# Altium PCB STLINKV2.PcbDoc (part 1 of 2)
Units mm, origin at the board's own origin, x right, y up, seen from the top; angles counter-clockwise.
Board outline 43.47 x 15.24 mm, 2 copper layers (Top Layer, Bottom Layer), stack 1.062 mm thick; 48 components, 36 nets, 171 pads, 85 vias.
Unrouted connection lines stored in the file: 38.
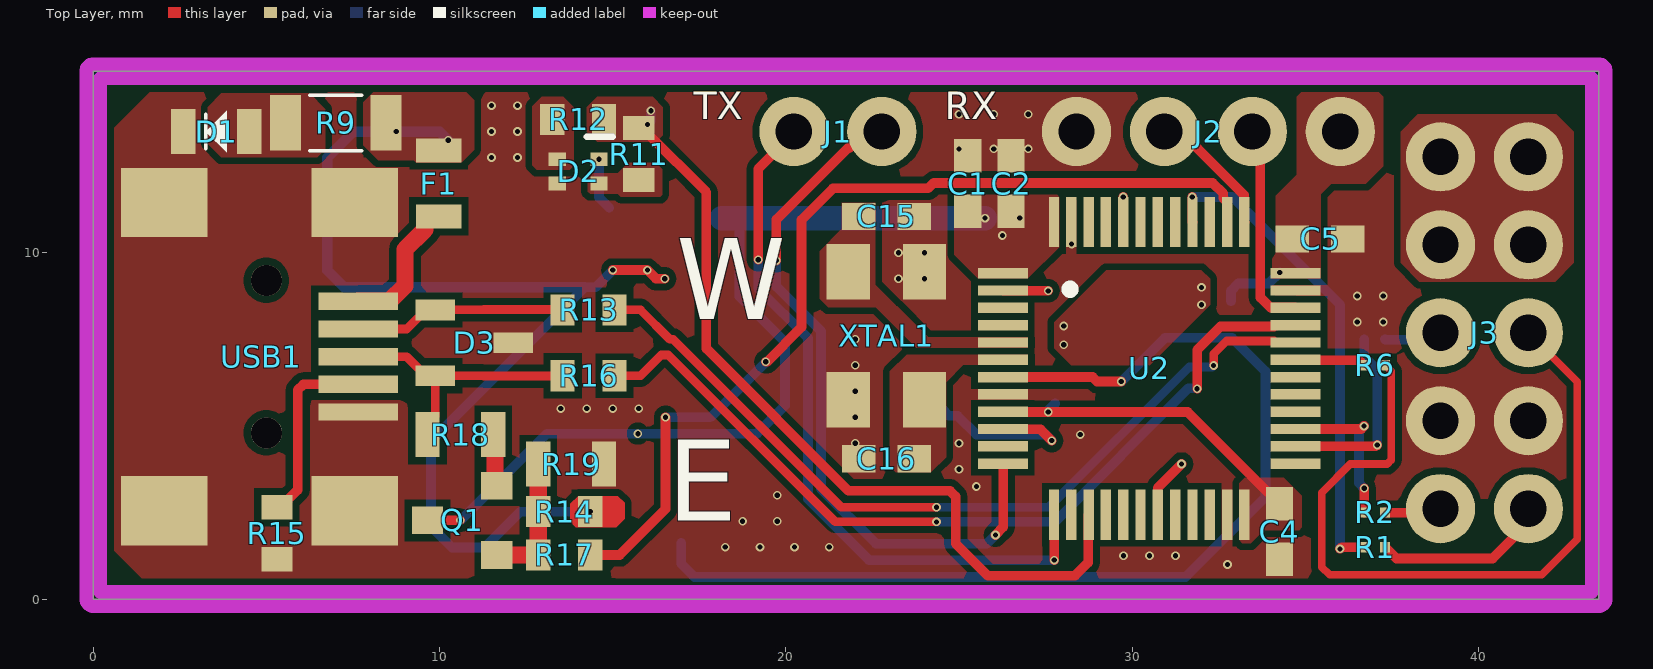
[diagram p0: Top Layer view]
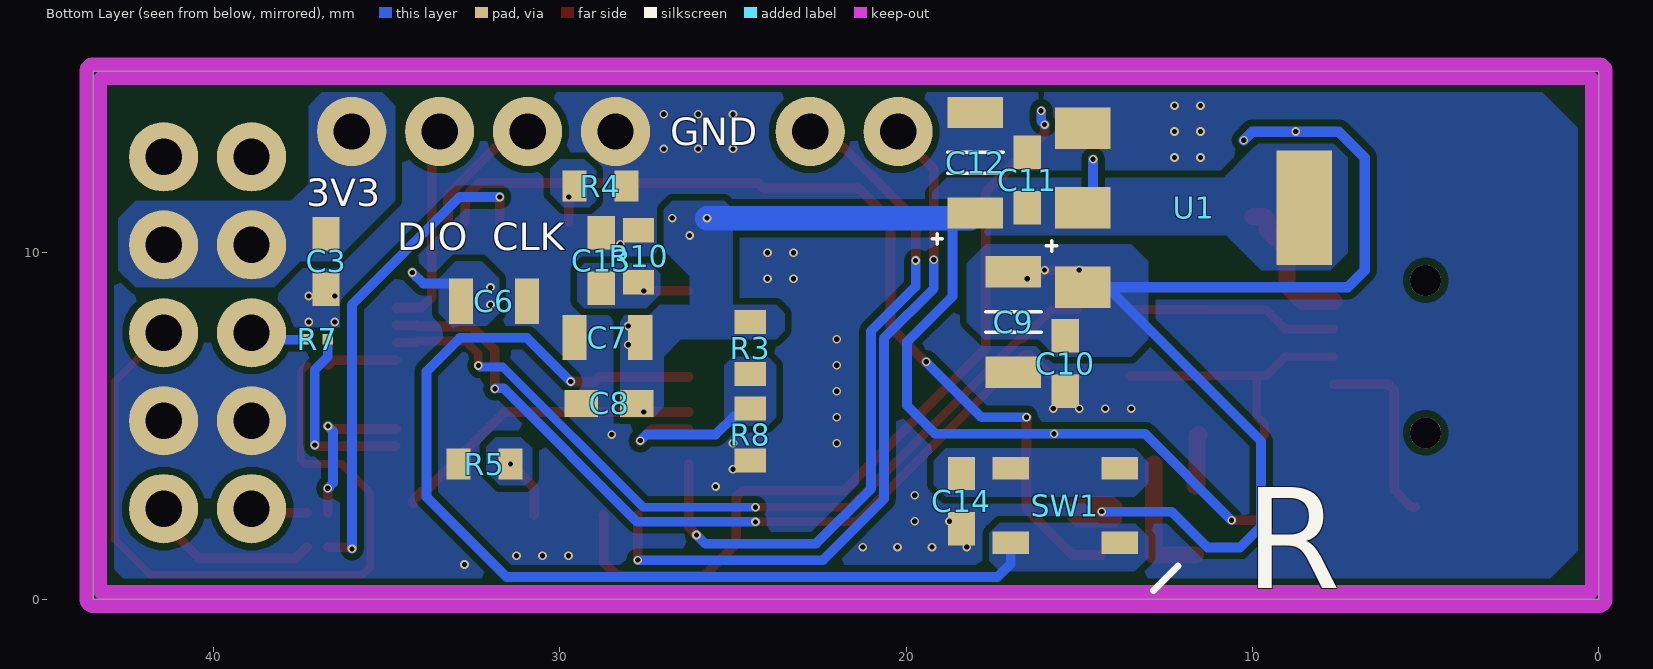
[diagram p1: Bottom Layer view, seen from below]
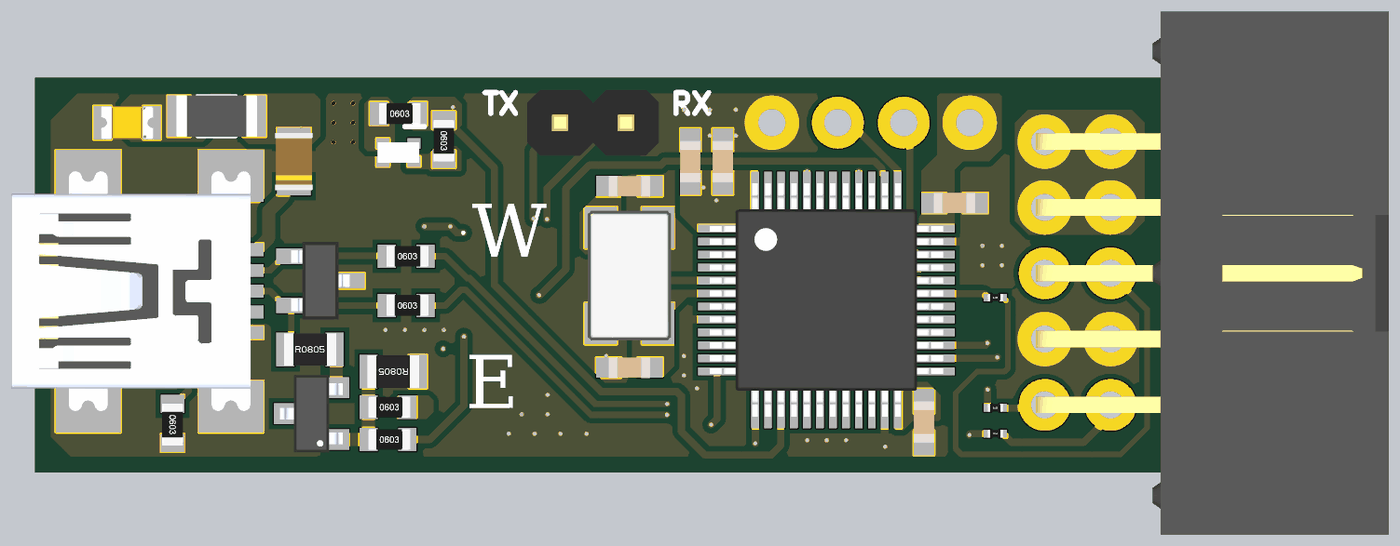
[diagram p2: 3D render of the assembled board from above, using the file's embedded part models]
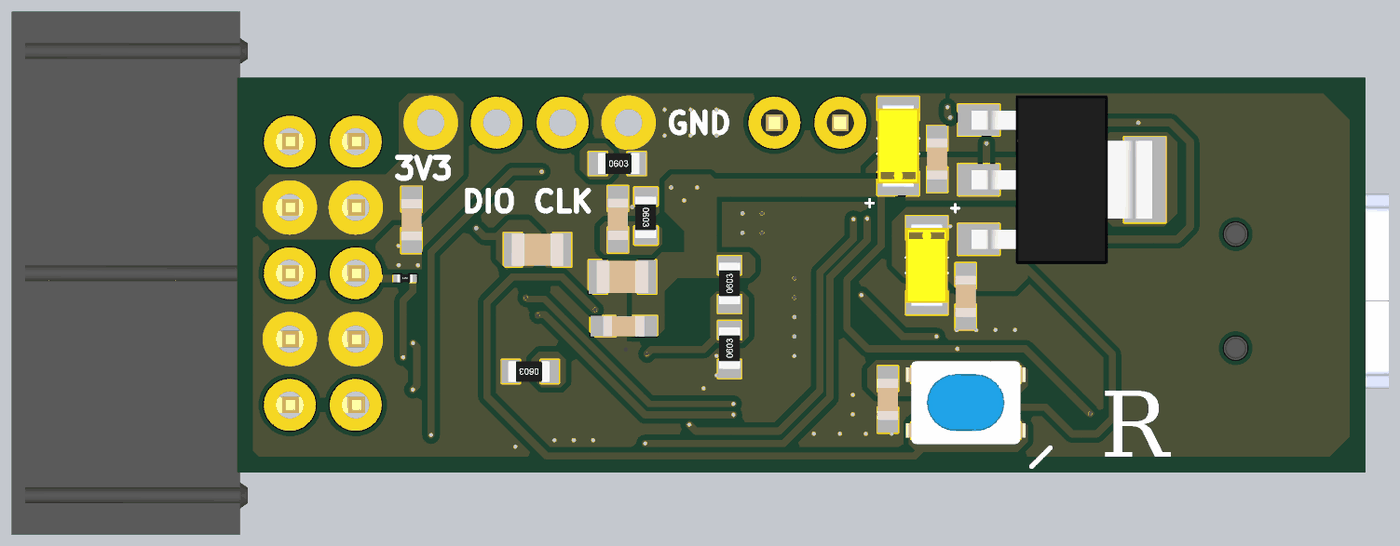
[diagram p3: 3D render of the assembled board from below, using the file's embedded part models]

## Layer stack, top to bottom
Top Solder: solder mask 0.0102, Solder Resist, Dk 3.5
Top Layer: signal copper 0.0356
Dielectric 1: dielectric 0.9906, FR-4, Dk 4.8
Bottom Layer: signal copper 0.0356
Bottom Solder: solder mask 0.0102, Solder Resist, Dk 3.5

## Board outline
0,0 0,15.24 43.47,15.24 43.47,0

## Design rules (kind name [scope] priority, off if disabled: settings)
BoardOutlineClearance [All] p1: gap=0.2 ignorepadtopadclearanceinfootprint=FALSE except(0: Arc-SplitContinuation Track-SplitContinuation SMDPad-SplitContinuation THPad-SplitContinuation Via-SplitContinuation Fill-SplitContinuation Poly-SplitContinuation Region-SplitContinuation Text-SplitContinuation)
Clearance [All] p1: gap=0.2 ignorepadtopadclearanceinfootprint=FALSE except(0: Arc-Hole Track-Hole SMDPad-Hole THPad-Hole Via-Hole Fill-Hole Poly-Hole Region-Hole Text-Hole; 0.1: Arc-Arc Arc-Track Arc-SMDPad Arc-Via Track-Track Track-SMDPad Track-Via SMDPad-Via THPad-Via Via-Via; 0.3: Arc-THPad Track-THPad)
DiffPairsRouting DiffPairsRouting_1 [All] p1: maxlimit=0.1 minlimit=0.1 mostfreqgap=0.1 toplayer_minwidth=0.25 toplayer_maxwidth=0.25 toplayer_prefwidth=0.25 bottomlayer_minwidth=0.25 bottomlayer_maxwidth=0.25 bottomlayer_prefwidth=0.25 impedanceprofiledriven=TRUE impedanceprofileid={4BED7BEF-0427-406D-AE6A-BF7EE6FA518D} impedanceprofilevalue=90.000000 maxuncoupledlength=12.7
DiffPairsRouting [All] p2: maxlimit=0.1 minlimit=0.1 mostfreqgap=0.1 toplayer_minwidth=0.25 toplayer_maxwidth=0.25 toplayer_prefwidth=0.25 bottomlayer_minwidth=0.25 bottomlayer_maxwidth=0.25 bottomlayer_prefwidth=0.25 impedanceprofiledriven=TRUE impedanceprofileid={5705A012-6DC9-405D-9E10-A1258226CF84} impedanceprofilevalue=90.000000 maxuncoupledlength=12.7
HoleSize [All] p1: absolutevalues=TRUE maxlimit=6.3 minlimit=0.15 maxpercent=80.000 minpercent=20.000
HoleToHoleClearance [All] p1: gap=0.1 allowstackedmicrovias=TRUE
MinimumSolderMaskSliver [All] p1: minsoldermaskwidth=0.1
PlaneClearance [All] p1: clearance=0.3
PlaneConnect [All] p1: planeconnectstyle=Direct reliefexpansion=0.508 reliefentries=4 reliefconductorwidth=0.254 reliefairgap=0.254
PolygonConnect [All] p1: connectstyle=Direct reliefconductorwidth=0.254 reliefentries=4 polygonreliefangle="90 Angle" airgapwidth=0.254
RoutingVias [All] p1: holewidth=0.15 width=0.25 viastyle="Through Hole" minholewidth=0.15 minwidth=0.25 maxholewidth=6 maxwidth=6.15
SilkToSilkClearance [All] p1: silktosilkclearance=0.15
SilkToSolderMaskClearance [IsPad] p1: minsilkscreentomaskgap=0.15 clearancetoexposedcopper=TRUE
SolderMaskExpansion [All] p1: expansion=0.05 istentingtop=FALSE
Width [All] p1: maxlimit=30 minlimit=0.1 preferedwidth=0.7 minimp=50.000000 maximp=50.000000 favimp=50.000000
22 further rules are at their usual default settings.

## Classes and differential pairs
component class PowerManagement: C1 C2 C3 C4 C5 C6 C7 C8 C9 C10 C11 C12 J1 J2 J3 R1 R2 R3 R4 R5 R6 R7 R8 U1
component class MCU: C13 C14 C15 C16 D1 D2 R9 R10 R11 R12 R13 R16 SW1 U2 XTAL1
component class USB: D3 F1 Q1 R14 R15 R17 R18 R19 USB1
differential pair USB: +USB_P -USB_N
differential pair USB_RES: +USB_RES_P -USB_RES_N

## Components (designator, comment, footprint, x,y, rotation, side; value= is the part's Value field where it differs from the comment)
C1 "C0603C104K5RACTU" CAP_0603 25.25,12 r270 top
C2 "C0603C104K5RACTU" CAP_0603 26.5,12 r270 top
C3 "C0603C104K5RACTU" CAP_0603 36.75,9.75 r90 bottom
C4 "C0603C104K5RACTU" CAP_0603 34.25,1.95 r90 top
C5 "C0603C104K5RACTU" CAP_0603 35.425,10.4 r180 top
C6 "CL21A475KAQNNNE" CAP_0805 31.9,8.6 r0 bottom
C7 "CL21B105KBFNNNE" CAP_0805 28.625,7.55 r180 bottom
C8 "0603B103K160CT" CAP_0603 28.575,5.65 r180 bottom
C9 "T491A106K010AT" CAP_1206_TANT 16.9,8 r270 bottom
C10 "C0603C104K5RACTU" CAP_0603 15.4,6.8 r90 bottom
C11 "C0603C104K5RACTU" CAP_0603 16.5,12.1 r270 bottom
C12 "T491A106K010AT" CAP_1206_TANT 18,12.6 r90 bottom
C13 "C0603C104K5RACTU" CAP_0603 28.8,9.775 r270 bottom
C14 "C0603C104K5RACTU" CAP_0603 18.4,2.825 r90 bottom
C15 "CC0603FRNPO9BN120" CAP_0603 22.9,11.05 r180 top
C16 "CC0603FRNPO9BN120" CAP_0603 22.9,4.05 r0 top
D1 "LTST-C170KFKT" LED_ORANGE_0805 3.55,13.5 r0 top
D2 "APHB1608CGKSURKC" LED_INDP_GREENRED_0603 14,12.35 r0 top
D3 "SM712" SOT-23 11,7.4 r0 top
F1 "PRG21BC1R0MM1RA" FUSE_0805 9.975,12 r90 top
J1 "61300211121" "2X1 MALE HEADER 2.54MM" 21.5,13.5 r0 top
J2 "2.54mm" "4X1 PINOUT" 32.2,13.5 r180 top
J3 "SBH11-PBPC-D05-RA-BK" "5X2 MALE HEADER 2.54MM SHROUDED - 4 WALL" 38.9,7.69 r270 top
Q1 "BC817-16" SOT23 10.65,2.275 r90 top
R1 "AC0201FR-0722RL" RES_0201 37,1.5 r0 top
R2 "AC0201FR-0722RL" RES_0201 37,2.5 r0 top
R3 "RC0603JR-074K7L" RES_0603 24.5,7.25 r90 bottom
R4 "RC0603FR-0710KL" RES_0603 28.825,11.925 r180 bottom
R5 "RC0603FR-0710KL" RES_0603 32.175,3.9 r0 bottom
R6 "AC0201FR-0722RL" RES_0201 37,6.75 r0 top
R7 "AC0201FR-0722RL" RES_0201 37,7.5 r0 bottom
R8 "RC0603JR-074K7L" RES_0603 24.5,4.75 r90 bottom
R9 "RC1206FR-07680RL" RES_1206 7,13.75 r180 top
R10 "RC0603FR-0710KL" RES_0603 27.725,9.9 r270 bottom
R11 "ERJ-H3EF3300V" RES_0603 15.75,12.85 r270 top
R12 "ERJ-H3EF3300V" RES_0603 14,13.85 r0 top
R13 "RC0603JR-0715RL" RES_0603 14.3,8.35 r0 top
R14 "RC0603FR-0710KL" RES_0603 13.6,2.525 r0 top
R15 "RC0603FR-0710KL" RES_0603 5.3,1.9 r270 top
R16 "RC0603JR-0715RL" RES_0603 14.3,6.45 r0 top
R17 "RC0603JR-07100RL" RES_0603 13.6,1.275 r0 top
R18 "RC0805FR-071K5L" RES_0805 10.6,4.75 r0 top
R19 "RC0805FR-0736KL" RES_0805 13.8,3.9 r180 top
SW1 "PTS810 SJG 250 SMTR LFS" BUTTON_SMD_BLUE 15.4,2.7 r0 bottom
U1 "LM1117MPX-33NOPB" SOT223 11.7,11.3 r270 bottom
U2 "STM32F103C8T6" LQFP48-STM 30.49,6.66 r0 top
USB1 "690-005-299-043" MINI_USB_B 5,7 r270 top
XTAL1 "ECS-80-10-30B-CWN-TR" "4-SMD, No Lead" 22.9,7.6 r270 top

## Footprints (in the part's own frame and the unit in brackets; to place one, negate y for a bottom-side part, rotate by r counter-clockwise, add the part's x,y. Pads: shape width x height; smd on the part's side, far side on the other; paste and mask are expansions set on the pad)
"2X1 MALE HEADER 2.54MM" [mm]
  round 2 hole 1.05 mask+0.05: 1(-1.27,0) 2(1.27,0)
  body extent -2.54,-1.27 2.54,1.27, height 8.54
"4-SMD, No Lead" [mm] "4-SMD, No Lead"
  rect 1.6x1.25 smd mask+0.05: 1(-1.85,-1.1) 2(1.85,-1.1) 3(1.85,1.1) 4(-1.85,1.1)
  body extent -2.5,-1.6 2.5,1.6, height 0.85
"4X1 PINOUT" [mm]
  round 2 hole 1.05 mask+0.05: 1(-3.81,0) 2(-1.27,0) 3(1.27,0) 4(3.81,0)
"5X2 MALE HEADER 2.54MM SHROUDED - 4 WALL" [mm]
  round 2 hole 1.05 mask+0.05: 1(5.08,2.54) 2(5.08,0) 3(2.54,2.54) 4(2.54,0) 5(0,2.54) 6(0,0) 7(-2.54,2.54) 8(-2.54,0) 9(-5.08,2.54) 10(-5.08,0)
  body extent -10.1,-0.35 10.1,13.25, height 9.09
BUTTON_SMD_BLUE [mm] "TACTICLE SWITCH 4.20mm x 3.20mm"
  rect 1.05x0.65 smd mask+0.05: 1(-1.575,1.075) 2(1.575,1.075) 3(-1.575,-1.075) 4(1.575,-1.075)
  silkscreen extent -3.25,1.75 -2.54,2.46, body extent -2.3,-1.6 2.3,1.6, height 2.7
CAP_0603 [mil]
  rect 38x31 smd mask+1.97: 1(-31.5,0) 2(31.5,0)
  body extent -31,-16 31,16, height 31
CAP_0805 [mm]
  rect 0.7x1.3 smd mask+0.05: 1(-0.95,0) 2(0.95,0)
  body extent -1,-0.63 1,0.63, height 0.6
CAP_1206_TANT [mm]
  rect 0.9x1.6 smd mask+0.05: 1(-1.45,0) 2(1.45,0)
  silkscreen extent -2.35,-0.8 0.3,1.25, body extent -1.6,-0.8 1.6,0.8, height 1.8
FUSE_0805 [mm]
  rect 0.7x1.3 smd mask+0.05: 1(-0.95,0) 2(0.95,0)
  body extent -1.1,-0.72 1.1,0.72, height 1.09
LED_INDP_GREENRED_0603 [mm]
  rect 0.5x0.4 smd mask+0.05: 1(0.6,0.35) 2(-0.6,0.35) 3(0.6,-0.35) 4(-0.6,-0.35)
  silkscreen extent 0.25,1 1,1, body extent -0.8,-0.4 0.8,0.4, height 0.5
LED_ORANGE_0805 [mm]
  rect 0.7x1.3 smd mask+0.05: 1(-0.95,0) 2(0.95,0)
  silkscreen extent -0.3,-0.6 0.3,0.6, body extent -1,-0.63 1,0.63, height 0.8
LQFP48-STM [mm] "TSQFP, 48-Leads, Body 7,00x7,00mm, Pitch 0,50mm, IPC Medium Density"
  rect 1.45x0.3 smd mask+0.05: 1(-4.225,2.75) 2(-4.225,2.25) 3(-4.225,1.75) 4(-4.225,1.25) 5(-4.225,0.75) 6(-4.225,0.25) 7(-4.225,-0.25) 8(-4.225,-0.75) 9(-4.225,-1.25) 10(-4.225,-1.75) 11(-4.225,-2.25) 12(-4.225,-2.75) 25(4.225,-2.75) 26(4.225,-2.25) 27(4.225,-1.75) 28(4.225,-1.25) 29(4.225,-0.75) 30(4.225,-0.25) 31(4.225,0.25) 32(4.225,0.75) 33(4.225,1.25) 34(4.225,1.75) 35(4.225,2.25) 36(4.225,2.75)
  rect 0.3x1.45 smd mask+0.05: 13(-2.75,-4.225) 14(-2.25,-4.225) 15(-1.75,-4.225) 16(-1.25,-4.225) 17(-0.75,-4.225) 18(-0.25,-4.225) 19(0.25,-4.225) 20(0.75,-4.225) 21(1.25,-4.225) 22(1.75,-4.225) 23(2.25,-4.225) 24(2.75,-4.225) 37(2.75,4.225) 38(2.25,4.225) 39(1.75,4.225) 40(1.25,4.225) 41(0.75,4.225) 42(0.25,4.225) 43(-0.25,4.225) 44(-0.75,4.225) 45(-1.25,4.225) 46(-1.75,4.225) 47(-2.25,4.225) 48(-2.75,4.225)
  silkscreen extent -2.41,2.16 -2.16,2.41, body extent -4.5,-4.5 4.5,4.5, height 1.6
MINI_USB_B [mm]
  rect 0.5x2.3 smd: 1(-1.6,2.65) 2(-0.8,2.65) 3(0,2.65) 4(0.8,2.65) 5(1.6,2.65)
  rect 2x2.5 smd: SH1(-4.45,2.55) SH2(4.45,2.55) SH3(4.45,-2.95) SH4(-4.45,-2.95)
  round 0.9 hole 0.9 unplated: ""(-2.2,0) ""(2.2,0)
  body extent -4.62,-5.9 4.62,3.3, height 3.98
RES_0201 [mm]
  rect 0.3x0.3 smd mask+0.05: 1(-0.3,0) 2(0.3,0)
  body extent -0.3,-0.15 0.3,0.15, height 0.24
RES_0603 [mm]
  rect 0.7x0.9 smd mask+0.05: 1(-0.75,0) 2(0.75,0)
  body extent -0.75,-0.4 0.85,0.4, height 0.48
RES_0805 [mm]
  rect 0.7x1.3 smd mask+0.05: 1(-0.95,0) 2(0.95,0)
  body extent -1,-0.63 1,0.63, height 0.6
RES_1206 [mm]
  rect 0.9x1.6 smd mask+0.05: 1(-1.45,0) 2(1.45,0)
  silkscreen extent -0.75,-0.8 0.75,0.8, body extent -1.55,-0.8 1.55,0.8, height 0.65
SOT23 [mm]
  rect 0.8x0.9 smd mask+0.05: 1(0,1) 2(-1,-1) 3(1,-1)
  body extent -1.5,-1.21 1.5,1.21, height 1.12
SOT223 [mm]
  rect 1.2x1.6 smd mask+0.05: 1(-2.3,-3.2) 2(0,-3.2) 3(2.3,-3.2)
  rect 3.3x1.6 smd mask+0.05: 2(0,3.2)
  body extent -3.25,-3.48 3.25,3.48, height 1.65
SOT-23 [mm]
  rect 1.15x0.6 smd: 1(-1.125,0.95) 2(-1.125,-0.95) 3(1.125,0)
  body extent -1.13,-1.5 1.13,1.5, height 1.2

## Part data
C1 C2 C3 C4 C5 C10 C11 C13 C14: library part "CAP CER 100nF 0603", "CAP CER 100nF %10 0603 SMD", Capacitance=100nF, Case Code (Metric)=1608, Case Code (Imperial)=0603, Dielectric=X7R, Dielectric Material=Ceramic, Manufacturer=KEMET, Max Operating Temperature=125°C, Min Operating Temperature=-55°C, Package Quantity=1, Supplier Part Number 1=399-5089-1-ND, Tolerance=10%, Voltage=50V, Case/Package=0603, Category="Ceramic Capacitors", ComponentLink1Description=https://datasheet.ciiva.com/7823/kem-c1002-x7r-smd-7823591.pdf?src-supplier=Element14, ComponentLink1URL=https://datasheet.ciiva.com/7823/kem-c1002-x7r-smd-7823591.pdf?src-supplier=Element14, ComponentLink2Description=https://datasheet.ciiva.com/14602/70095383-14602583.pdf?src-supplier=Allied+Electronics, ComponentLink2URL=https://datasheet.ciiva.com/14602/70095383-14602583.pdf?src-supplier=Allied+Electronics, ComponentLink3Description=https://datasheet.ciiva.com/5999/kem-c1002-x7r-smd-5999400.pdf?src-supplier=Farnell, ComponentLink3URL=https://datasheet.ciiva.com/5999/kem-c1002-x7r-smd-5999400.pdf?src-supplier=Farnell, ComponentLink4Description=https://datasheet.ciiva.com/7823/kem-c1002-x7r-smd-7823592.pdf?src-supplier=Element14, ComponentLink4URL=https://datasheet.ciiva.com/7823/kem-c1002-x7r-smd-7823592.pdf?src-supplier=Element14, ComponentLink5Description=https://datasheet.ciiva.com/28645/1851736-28645640.pdf?src-supplier=Element14, ComponentLink5URL=https://datasheet.ciiva.com/28645/1851736-28645640.pdf?src-supplier=Element14, ComponentLink6Description=https://datasheet.ciiva.com/14585/70095383-14585209.pdf?src-supplier=Allied+Electronics, ComponentLink6URL=https://datasheet.ciiva.com/14585/70095383-14585209.pdf?src-supplier=Allied+Electronics, Contact Plating=Tin,Matte, Depth=0.8mm, DesignedBy="Aslı Kurt", Dissipation Factor=2.5%, Height=0.8mm, Lead Pitch=0.7mm, Length=0.063inch, Manufacturer Part Number=C0603C104K5RACTU, Mount="Surface Mount", Number of Pins=2, Packaging="Tape and Reel", Pricing 1="1=0,12000, 10=0,08500, 50=0,04620, 100=0,03770, 500=0,02696, 1000=0,02118 (USD)", Radiation Hardening=No, REACH SVHC="No SVHC", RoHS=Yes, RoHS Compliant=Yes, Series="SMD Comm X7R", Stock 1=1666186, Supplier 1=Digi-Key, Termination=SMD/SMT, Thickness=0.034inch, Voltage Rating=50V, Voltage Rating (DC)=50V, Width=0.031inch
C6: library part "CAP CER 4.7uF 0805", "CAP CER 4.7uF %10 0805", Capacitance=4.7uF, Case Code (Metric)=2012, Case Code (Imperial)=0805, Dielectric=X5R, Manufacturer=Samsung, Max Operating Temperature=85°C, Min Operating Temperature=-55°C, Package Quantity=1, Supplier Part Number 1=1276-1244-1-ND, Tolerance=10%, Voltage Rating=25V, Case/Package=0805, Category="Ceramic Capacitors", ComponentLink1Description=https://datasheet.ciiva.com/25798/cl21a475kaqnnne-25798882.pdf?src-supplier=Digi-Key, ComponentLink1URL=https://datasheet.ciiva.com/25798/cl21a475kaqnnne-25798882.pdf?src-supplier=Digi-Key, Construction=Flat, Depth=1.25mm, DesignedBy="Aslı Kurt", Height=1.25mm, Lead Free="Lead Free", Length=2mm, Manufacturer Part Number=CL21A475KAQNNNE, Mount="Surface Mount", Packaging="Tape and Reel", Pricing 1="1=0,11000, 10=0,08100, 50=0,04580, 100=0,03800, 500=0,02664, 1000=0,02205 (USD)", Radiation Hardening=No, RoHS=Yes, RoHS Compliant=Yes, Series=CL, Stock 1=1477018, Supplier 1=Digi-Key, Thickness=0.055inch, Voltage Rating (DC)=25V, Width=0.049inch
C7: library part "CAP CER 1uF 0805", "CAP CER 1uF %10 0805", Capacitance=1uF, Case Code (Metric)=2012, Case Code (Imperial)=0805, Dielectric=X7R, Manufacturer=Samsung, Max Operating Temperature=125°C, Min Operating Temperature=-55°C, Package Quantity=1, Supplier Part Number 1=1276-1029-2-ND, Tolerance=10%, Voltage=50V, Case/Package=0805, Category="Ceramic Capacitors", ComponentLink1Description=https://datasheet.ciiva.com/25800/cl21b105kbfnnne-25800291.pdf?src-supplier=Digi-Key, ComponentLink1URL=https://datasheet.ciiva.com/25800/cl21b105kbfnnne-25800291.pdf?src-supplier=Digi-Key, ComponentLink2Description=https://datasheet.ciiva.com/16449/cl21b105kbfnnne-16449003.pdf?src-supplier=Future+Electronics, ComponentLink2URL=https://datasheet.ciiva.com/16449/cl21b105kbfnnne-16449003.pdf?src-supplier=Future+Electronics, ComponentLink3Description=https://datasheet.ciiva.com/26838/getdatasheetpartid-354075-26838668.pdf?src-supplier=Verical, ComponentLink3URL=https://datasheet.ciiva.com/26838/getdatasheetpartid-354075-26838668.pdf?src-supplier=Verical, Construction=Flat, Depth=1.25mm, DesignedBy="Aslı Kurt", Height=1.25mm, Length=2mm, Manufacturer Part Number=CL21B105KBFNNNE, Mount="Surface Mount", Packaging="Tape and Reel", Pricing 1="2000=0,02138, 4000=0,01956 (USD)", Radiation Hardening=No, RoHS=Yes, RoHS Compliant=Yes, Series=CL, Stock 1=958000, Supplier 1=Digi-Key, Thickness=0.053inch, Voltage Rating=50V, Width=0.049inch
C8: library part "CAP CER 10nF 0603", "CAP CER 10nF %10 0603", Capacitance=10nF, Case Code (Metric)=1608, Case Code (Imperial)=0603, Dielectric=X7R, Manufacturer="Walsin Technologies", Max Operating Temperature=125°C, Min Operating Temperature=-55°C, Supplier Part Number 1=1292-1384-1-ND, Tolerance=10%, Voltage Rating=16V, Case/Package=0603, Category="Ceramic Capacitors", ComponentLink1Description=http://www.farnell.com/datasheets/1958513.pdf?src-supplier=Farnell, ComponentLink1URL=http://www.farnell.com/datasheets/1958513.pdf?src-supplier=Farnell, ComponentLink2Description=http://components.arrow.com/part/dataview/0323_00656382?src-supplier=Arrow+Europe, ComponentLink2URL=http://components.arrow.com/part/dataview/0323_00656382?src-supplier=Arrow+Europe, ComponentLink3Description=http://www.farnell.com/datasheets/1958513.pdf?src-supplier=Element14, ComponentLink3URL=http://www.farnell.com/datasheets/1958513.pdf?src-supplier=Element14, ComponentLink4Description=http://www.passivecomponent.com/wp-content/uploads/2018/10/MLCC.pdf?src-supplier=Digi-Key, ComponentLink4URL=http://www.passivecomponent.com/wp-content/uploads/2018/10/MLCC.pdf?src-supplier=Digi-Key, Depth=0.8mm, DesignedBy="Aslı Kurt", Length=1.6mm, Manufacturer Part Number=0603B103K160CT, Packaging="Tape and Reel", Pricing 1="1=0,10000, 10=0,03600, 50=0,01940, 100=0,01590, 500=0,01136, 1000=0,00892 (USD)", REACH SVHC=Unknown, RoHS=Yes, RoHS Compliant=Yes, Stock 1=102474, Supplier 1=Digi-Key, Voltage Rating (DC)=16V
C9 C12: library part "CAP TANT 10uF 1206", "Cap Tant Solid 10uF 10V A CASE 10% (3.2 X 1.6 X 1.6mm) SMD 3216-18 4 Ohm 125 C T/R", Capacitance=10uF, Case Code (Metric)=3216, Case Code (Imperial)=1206, Dielectric Material=Tantalum, ESR (Equivalent Series Resistance)=4R, Leakage Current=1uA, Manufacturer=KEMET, Max Operating Temperature=125°C, Min Operating Temperature=-55°C, Package Quantity=1, Ripple Current=137mA, Supplier Part Number 1=399-3684-1-ND, Tolerance=10%, Voltage=10V, Case/Package=1206, Category="Tantalum Capacitors", ComponentLink1Description=https://datasheet.ciiva.com/7668/1732743-7668006.pdf?src-supplier=Element14, ComponentLink1URL=https://datasheet.ciiva.com/7668/1732743-7668006.pdf?src-supplier=Element14, ComponentLink2Description=https://datasheet.ciiva.com/27052/1573249-27052559.pdf?src-supplier=Jameco, ComponentLink2URL=https://datasheet.ciiva.com/27052/1573249-27052559.pdf?src-supplier=Jameco, ComponentLink3Description=https://datasheet.ciiva.com/257/kem-t2005-t491-257584.pdf?src-supplier=Digikey, ComponentLink3URL=https://datasheet.ciiva.com/257/kem-t2005-t491-257584.pdf?src-supplier=Digikey, ComponentLink4Description=https://datasheet.ciiva.com/11793/0900766b80718482-11793106.pdf?src-supplier=Rs, ComponentLink4URL=https://datasheet.ciiva.com/11793/0900766b80718482-11793106.pdf?src-supplier=Rs, ComponentLink5Description=https://datasheet.ciiva.com/7668/kem-t2005-t491-7668139.pdf?src-supplier=Element14, ComponentLink5URL=https://datasheet.ciiva.com/7668/kem-t2005-t491-7668139.pdf?src-supplier=Element14, ComponentLink6Description=https://datasheet.ciiva.com/7668/1854511-7668007.pdf?src-supplier=Element14, ComponentLink6URL=https://datasheet.ciiva.com/7668/1854511-7668007.pdf?src-supplier=Element14, ComponentLink7Description=https://datasheet.ciiva.com/7668/1446014-7668008.pdf?src-supplier=Element14, ComponentLink7URL=https://datasheet.ciiva.com/7668/1446014-7668008.pdf?src-supplier=Element14, ComponentLink8Description=https://datasheet.ciiva.com/7668/1854511-7668005.pdf?src-supplier=Element14, ComponentLink8URL=https://datasheet.ciiva.com/7668/1854511-7668005.pdf?src-supplier=Element14, ComponentLink9Description=https://datasheet.ciiva.com/257/kem-t2005-t491-257585.pdf?src-supplier=Digikey, ComponentLink9URL=https://datasheet.ciiva.com/257/kem-t2005-t491-257585.pdf?src-supplier=Digikey, ComponentLink10Description=https://datasheet.ciiva.com/257/kem-t2005-t491-257586.pdf?src-supplier=Digikey, ComponentLink10URL=https://datasheet.ciiva.com/257/kem-t2005-t491-257586.pdf?src-supplier=Digikey, ComponentLink11Description=https://datasheet.ciiva.com/14586/70095774-14586699.pdf?src-supplier=Allied+Electronics, ComponentLink11URL=https://datasheet.ciiva.com/14586/70095774-14586699.pdf?src-supplier=Allied+Electronics, ComponentLink12Description=https://datasheet.ciiva.com/14596/70095774-14596972.pdf?src-supplier=Allied+Electronics, ComponentLink12URL=https://datasheet.ciiva.com/14596/70095774-14596972.pdf?src-supplier=Allied+Electronics, ComponentLink13Description=https://datasheet.ciiva.com/12882/kem-t2005-t491-12882826.pdf?src-supplier=Mouser, ComponentLink13URL=https://datasheet.ciiva.com/12882/kem-t2005-t491-12882826.pdf?src-supplier=Mouser, ComponentLink14Description=https://datasheet.ciiva.com/29244/458293-da-01-en-kondensator-10uf-3216-10pr-10v-85c-29244583.pdf?src-supplier=Conrad, ComponentLink14URL=https://datasheet.ciiva.com/29244/458293-da-01-en-kondensator-10uf-3216-10pr-10v-85c-29244583.pdf?src-supplier=Conrad, Construction=Flat, Depth=1.6mm, DesignedBy="Aslı Kurt", Dissipation Factor=6%, Features="General Purpose", Height=1.6mm, Height - Seated (Max)=0.071inch, Lead Free=5697LeadFree, Length=3.2mm, Manufacturer Part Number=T491A106K010AT, Mount="Surface Mount,PCB", Packaging="Tape and Reel", Polarity=Polar, Pricing 1="1=0,32, 10=0,209, 50=0,154, 100=0,1255, 500=0,09904, 1000=0,08364 (USD)", Reach SVHC Compliant=No, RoHS=Yes, RoHS Compliant=Yes, Series=T491, Size=1.6mm, Stock 1=1419669, Supplier 1=Digikey, Termination=SMD/SMT, Voltage Rating=10V, Voltage Rating (DC)=10V, Width=0.063inch
C15 C16: library part "CAP CER 12pF 0603", "Multilayer Ceramic Capacitor, 12 pF, 50 V, ï¿½ 1%, C0G (NP0), 0603 [1608 Metric]", Capacitance=12pF, Case Code (Metric)=1608, Case Code (Imperial)=0603, Dielectric=C0G, Manufacturer=Yageo, Max Operating Temperature=125°C, Min Operating Temperature=-55°C, Package Quantity=4000, Supplier Part Number 1=7517501, Tolerance=1%, Voltage=10V, Voltage Rating=50V, Insulation Resistance=10GR, Case/Package=0603, Category="Ceramic Capacitors", ComponentLink1Description=https://datasheet.ciiva.com/13386/upy-gp-np0-16v-to-50v-8-13386294.pdf?src-supplier=Mouser, ComponentLink1URL=https://datasheet.ciiva.com/13386/upy-gp-np0-16v-to-50v-8-13386294.pdf?src-supplier=Mouser, Depth=0.8mm, DesignedBy="Aslı Kurt", Halogen Free=5694HalogenFree, Height=0.8mm, Lead Free="Lead Free", Length=1.6mm, Manufacturer Part Number=CC0603FRNPO9BN120, Mount="Surface Mount", Packaging="Tape and Reel", Pricing 1="4000=0,0152, 12000=0,0148, 20000=0,0147, 80000=0,0142, 120000=0,014 (USD)", Pricing 2="4000=0,0162, 8000=0,016, 24000=0,0159, 48000=0,0157, 100000=0,0155 (USD)", Pricing 3="500=0,0393, 1000=0,0327, 2000=0,032 (EUR)", Pricing 4="1=0,18, 10=0,076, 50=0,076, 100=0,044, 1000=0,035, 10000=0,023 (USD)", Pricing 5="1=0,16, 10=0,089, 50=0,0622, 100=0,0539, 500=0,03984, 1000=0,03547 (USD)", Radiation Hardening=No, RoHS=Yes, RoHS Compliant=Yes, Series=CC, Stock 1=4000, Stock 2=68000, Stock 3=16190, Stock 4=38219, Stock 5=15553, Supplier 1="Future Electronics", Supplier 2="Arrow Electronics", Supplier 3=Farnell, Supplier 4=Mouser, Supplier 5=Digikey, Supplier Part Number 2=CC0603FRNPO9BN120, Supplier Part Number 3=3764409RL, Supplier Part Number 4=603-C0603FRNPO9BN120, Supplier Part Number 5=311-3885-1-ND, Termination=SMD/SMT, Thickness=0.035inch, Voltage Rating (DC)=50V, Width=0.031inch
D1: library part "LED ORANGE 0805", "LED Uni-Color Orange 611nm 2-Pin Chip LED T/R / LED ORANGE CLEAR 0805 SMD", Case Code (Metric)=2012, Case Code (Imperial)=0805, Color=Orange, Forward Current=30mA, Forward Voltage=2V, Lens Color=Colorless, Manufacturer="Vishay Lite-On", Max Operating Temperature=85°C, Min Operating Temperature=-55°C, Package Quantity=1, Power Dissipation=75mW, Reverse Voltage=5V, Supplier Part Number 1=160-1413-1-ND, Test Current=20mA, Case/Package=0805, Category=LEDs, ComponentLink1Description=https://datasheet.ciiva.com/12403/lite-on-ltst-c170kfkt-187690-12403821.pdf?src-supplier=Mouser, ComponentLink1URL=https://datasheet.ciiva.com/12403/lite-on-ltst-c170kfkt-187690-12403821.pdf?src-supplier=Mouser, ComponentLink2Description=https://datasheet.ciiva.com/11773/0900766b80dc0279-11773662.pdf?src-supplier=Rs, ComponentLink2URL=https://datasheet.ciiva.com/11773/0900766b80dc0279-11773662.pdf?src-supplier=Rs, ComponentLink3Description=https://datasheet.ciiva.com/15117/getdatasheetpartid-158266-15117926.pdf?src-supplier=Verical, ComponentLink3URL=https://datasheet.ciiva.com/15117/getdatasheetpartid-158266-15117926.pdf?src-supplier=Verical, ComponentLink4Description=https://datasheet.ciiva.com/16427/ltst-c170kfkt-16427484.pdf?src-supplier=Future+Electronics, ComponentLink4URL=https://datasheet.ciiva.com/16427/ltst-c170kfkt-16427484.pdf?src-supplier=Future+Electronics, ComponentLink5Description=https://datasheet.ciiva.com/2110/s-110-ltst-c170kfkt-2110076.pdf?src-supplier=Digikey, ComponentLink5URL=https://datasheet.ciiva.com/2110/s-110-ltst-c170kfkt-2110076.pdf?src-supplier=Digikey, ComponentLink6Description=https://datasheet.ciiva.com/2110/s-110-ltst-c170kfkt-2110075.pdf?src-supplier=Digikey, ComponentLink6URL=https://datasheet.ciiva.com/2110/s-110-ltst-c170kfkt-2110075.pdf?src-supplier=Digikey, ComponentLink7Description=https://datasheet.ciiva.com/2110/s-110-ltst-c170kfkt-2110077.pdf?src-supplier=Digikey, ComponentLink7URL=https://datasheet.ciiva.com/2110/s-110-ltst-c170kfkt-2110077.pdf?src-supplier=Digikey, Depth=1.6mm, DesignedBy="Aslı Kurt", Dominant Wavelength=605nm, Height=1.1mm, Lead Free="Lead Free", Length=3.2mm, Lens Style=Diffused,Colorless,Rectangular,Clear, Lens Transparency=Clear, Luminous Intensity=60mcd, Manufacturer Part Number=LTST-C170KFKT, Mount="Surface Mount", Number of Elements=1, Number of LEDs=1, Number of Pins=2, Packaging="Tape and Reel", Power Rating=75mW, Pricing 1="1=0,23, 10=0,127, 100=0,0762, 500=0,05646, 1000=0,05041 (USD)", Radiation Hardening=No, RoHS=Yes, RoHS Compliant=Yes, Stock 1=367568, Supplier 1=Digikey, Viewing Angle=130°, Wavelength=611nm, Width=1.25mm, Illumination Color=Orange
D2: library part LED_INDP_GREENRED_0603, "Green/Red 0603 130° Clear 50/250 mcd 2.1/1.95 V Surface Mount Flat Top LED", Manufacturer=Kingbright, Supplier Part Number 1=8000491, Category=LEDs, ComponentLink1Description=https://datasheet.ciiva.com/4688/aphb1608cgksurkc-39721-4688241.pdf?src-supplier=Mouser, ComponentLink1URL=https://datasheet.ciiva.com/4688/aphb1608cgksurkc-39721-4688241.pdf?src-supplier=Mouser, ComponentLink2Description=https://datasheet.ciiva.com/2121/aphb1608cgksurkc-2121286.pdf?src-supplier=Digikey, ComponentLink2URL=https://datasheet.ciiva.com/2121/aphb1608cgksurkc-2121286.pdf?src-supplier=Digikey, DesginedBy="Aslı Kurt", Lead Free=5697LeadFree, Manufacturer Part Number=APHB1608CGKSURKC, Pricing 1="2000=0,11, 4000=0,107, 6000=0,105, 10000=0,103, 20000=0,0988 (USD)", Pricing 2="1=0,48, 10=0,303, 50=0,303, 100=0,175, 1000=0,137, 10000=0,099 (USD)", Pricing 3="1=0,49, 10=0,303, 100=0,1742, 1000=0,13635 (USD)", Pricing 4="1=0,49, 10=0,303, 100=0,1742, 1000=0,13635 (USD)", Pricing 5="613=0,163, 1000=0,1269, 2000=0,097, 10000=0,0952 (USD)", RoHS=No, Stock 1=22000, Stock 2=32899, Stock 3=21739, Stock 4=21739, Stock 5=265438, Supplier 1="Future Electronics", Supplier 2=Mouser, Supplier 3=Digikey, Supplier 4=Digikey, Supplier 5="Arrow Electronics", Supplier Part Number 2=604-APHB1608CGKSURKC, Supplier Part Number 3=754-2165-6-ND, Supplier Part Number 4=754-2165-1-ND, Supplier Part Number 5=APHB1608CGKSURKC, Wavelength=570nm
D3: "7V/12V Tvs, Package SOT-23, Tvs A", Manufacturer="Sangdest Microelectronics", Supplier Part Number 1=1655-SM712CT-ND, Category="TVS Diodes", DesignedBy="Aslı Kurt", Manufacturer Part Number=SM712, Pricing 1="1=0,19, 10=0,132, 100=0,0887, 500=0,06778, 1000=0,06074 (USD)", Pricing 2="3000=0,05156, 6000=0,04684, 9000=0,04441, 15000=0,04165, 21000=0,04001, 30000=0,03841, 75000=0,03487, 150000=0,0339 (USD)", RoHS=No, Stock 1=85900, Stock 2=84000, Supplier 1=Digikey, Supplier 2=Digikey, Supplier Part Number 2=1655-SM712TR-ND
F1: "Thermistor PTC 1 Ohm 20% 2-Pin 0805 Surface Mount Solder Pad Embossed T/R", Manufacturer=Murata, Supplier Part Number 1=81-PRG21BC1R0MM1RA, Voltage Rating=12V, Category=Thermistors, ComponentLink1Description=https://datasheet.ciiva.com/30488/0900766b81259d6c-30488358.pdf?src-supplier=Rs, ComponentLink1URL=https://datasheet.ciiva.com/30488/0900766b81259d6c-30488358.pdf?src-supplier=Rs, ComponentLink2Description=https://datasheet.ciiva.com/327/ntc-ptcthermistorsforautomotive-327122.pdf?src-supplier=Digikey, ComponentLink2URL=https://datasheet.ciiva.com/327/ntc-ptcthermistorsforautomotive-327122.pdf?src-supplier=Digikey, ComponentLink3Description=https://datasheet.ciiva.com/29603/s0363e-29603286.pdf?src-supplier=Digikey, ComponentLink3URL=https://datasheet.ciiva.com/29603/s0363e-29603286.pdf?src-supplier=Digikey, ComponentLink4Description=https://datasheet.ciiva.com/29603/s0363e-29603287.pdf?src-supplier=Digikey, ComponentLink4URL=https://datasheet.ciiva.com/29603/s0363e-29603287.pdf?src-supplier=Digikey, ComponentLink5Description=https://datasheet.ciiva.com/29603/s0363e-29603289.pdf?src-supplier=Digikey, ComponentLink5URL=https://datasheet.ciiva.com/29603/s0363e-29603289.pdf?src-supplier=Digikey, ComponentLink6Description=https://datasheet.ciiva.com/3282/r90e-3282510.pdf?src-supplier=Avnet, ComponentLink6URL=https://datasheet.ciiva.com/3282/r90e-3282510.pdf?src-supplier=Avnet, DesignedBy="Aslı Kurt", Lead Free=5697LeadFree, Manufacturer Part Number=PRG21BC1R0MM1RA, Pricing 1="1=0,62, 10=0,479, 50=0,479, 100=0,419, 1000=0,336, 10000=0,231 (USD)", Pricing 2="387=0,3643, 1000=0,3353, 4000=0,2764 (USD)", Pricing 3="1=0,73, 5=0,612, 10=0,568, 25=0,5156, 50=0,4788, 100=0,4449, 500=0,37522, 1000=0,3487 (USD)", Pricing 4="1=0,73, 5=0,612, 10=0,568, 25=0,5156, 50=0,4788, 100=0,4449, 500=0,37522, 1000=0,3487 (USD)", Pricing 5="4000=0,23392, 8000=0,23138 (USD)", RoHS=Yes, Stock 1=2720, Stock 2=3860, Stock 3=24892, Stock 4=24892, Stock 5=24000, Supplier 1=Mouser, Supplier 2="Arrow Electronics", Supplier 3=Digikey, Supplier 4=Digikey, Supplier 5=Digikey, Supplier Part Number 2=PRG21BC1R0MM1RA, Supplier Part Number 3=490-8511-1-ND, Supplier Part Number 4=490-8511-6-ND, Supplier Part Number 5=490-8511-2-ND
J1: library part "2x1 Male Header 2.54mm", DesignedBy="Aslı Kurt"
J2: library part "4x1 Pinout"
J3: library part "5x2 Male Header 2.54mm Shrouded - 4 Wall", "Conn Shrouded Header (4 Sides) HDR 10 POS 2.54mm Solder RA Side Entry Thru-Hole", Manufacturer=Sullins, Supplier Part Number 1=3706876, Category=Connectors, ComponentLink1Description=http://www.sullinscorp.com/catalogs/145_11_SERIES,_.100_BOX_HEADER.pdf?src-supplier=Future+Electronics, ComponentLink1URL=http://www.sullinscorp.com/catalogs/145_11_SERIES,_.100_BOX_HEADER.pdf?src-supplier=Future+Electronics, ComponentLink2Description=https://s3.amazonaws.com/catalogspreads-pdf/PAGE122%20.100%20SBH11%20SERIES%20MALE%20BOX%20HDR%20ST%20RA%20SMT.pdf?src-supplier=Digikey, ComponentLink2URL=https://s3.amazonaws.com/catalogspreads-pdf/PAGE122%20.100%20SBH11%20SERIES%20MALE%20BOX%20HDR%20ST%20RA%20SMT.pdf?src-supplier=Digikey, ComponentLink3Description=https://datasheet.octopart.com/SBH11-PBPC-D05-RA-BK-Sullins-datasheet-41399312.pdf?src-supplier=Future+Electronics, ComponentLink3URL=https://datasheet.octopart.com/SBH11-PBPC-D05-RA-BK-Sullins-datasheet-41399312.pdf?src-supplier=Future+Electronics, DesignedBy="Aslı Kurt", Lead Free=5697LeadFree, Manufacturer Part Number=SBH11-PBPC-D05-RA-BK, Pricing 1="1=0,415, 100=0,4, 300=0,385, 1000=0,37, 3000=0,345 (USD)", Pricing 2="1=0,73, 10=0,559, 80=0,43988, 440=0,36386, 1000=0,33318, 5000=0,2847 (USD)", RoHS=Yes, Stock 1=2002, Stock 2=10727, Supplier 1="Future Electronics", Supplier 2=Digikey, Supplier Part Number 2=S9177-ND
Q1: "ON Semi BC817-16LT1G NPN Bipolar Transistor; 0.5 A; 45 V; 3-Pin SOT-23", Case/Package=SOT-23-3, Collector Base Voltage (VCBO)=50V, Collector Emitter Breakdown Voltage=45V, Collector Emitter Saturation Voltage=700mV, Continuous Collector Current=500mA, Emitter Base Voltage (VEBO)=5V, Manufacturer="ON Semiconductor", Manufacturer Part Number=BC817-16LT1G, Max Operating Temperature=150°C, Max Power Dissipation=300mW, Min Operating Temperature=-55°C, Output Voltage=15V, Package Quantity=3000, Supplier Part Number 1=6937544, Transition Frequency=100MHz, Category=BJTs, Collector-emitter Voltage-Max=700mV, Current Rating=500mA, DesignedBy="Aslı Kurt", Gain Bandwidth Product=100MHz, Halogen Free="Halogen Free", Height=0.94mm, Lead Free="Lead Free", Length=2.9mm, Max Breakdown Voltage=45V, Max Collector Current=500mA, Number of Pins=3, Packaging="Tape and Reel", Polarity=NPN, Pricing 1="3000=0,0209, 12000=0,02, 30000=0,0147, 45000=0,0192, 75000=0,0143, 120000=0,0186, 300000=0,0177 (USD)", Pricing 2="1=0,158, 25=0,097, 50=0,079, 100=0,06, 250=0,052 (USD)", Pricing 3="3000=0,0223, 9000=0,016, 99000=0,0133 (USD)", Pricing 4="1000=0,033, 2000=0,028 (GBP)", Pricing 5="200=0,013, 1000=0,033, 2000=0,028 (GBP)", Pricing 6="1=0,1, 10=0,066, 100=0,0444, 500=0,03362, 1000=0,02993, 3000=0,02508, 6000=0,02256, 9000=0,02126, 15000=0,01978, 21000=0,0189, 30000=0,01803, 75000=0,01612, 150000=0,01492, 300000=0,0139 (USD)", Pricing 7="1=0,1, 10=0,066, 100=0,0444, 500=0,03362, 1000=0,02993 (USD)", RoHS=Yes, RoHS Compliant=Yes, Series=-, Stock 1=63000, Stock 2=3965, Stock 3=75000, Stock 4=73400, Stock 5=2400, Stock 6=15878, Stock 7=16878, Supplier 1="Future Electronics", Supplier 2=Avnet, Supplier 3="Arrow Electronics", Supplier 4=Rs, Supplier 5=Rs, Supplier 6=Digikey, Supplier 7=Digikey, Supplier Part Number 2=98H0503, Supplier Part Number 3=BC817-16LT1G, Supplier Part Number 4=463616P, Supplier Part Number 5=463616, Supplier Part Number 6=BC817-16LT1GOSCT-ND, Supplier Part Number 7=BC817-16LT1GOSDKR-ND, Voltage Rating (DC)=45V, Weight=0.001058oz, Width=1.3mm
R1 R2 R6 R7: library part "RES 22 OHM 0201", "SMD Chip Resistor, 22 Ohm, ± 1%, 50 mW, 0201 [0603 Metric], Thick Film, General Purpose", Manufacturer=Yageo, Resistance=22R, Supplier Part Number 1=4087310, Category="Chip SMD Resistors", ComponentLink1Description=https://datasheet.octopart.com/AC0201FR-0722RL-Yageo-datasheet-151884373.pdf?src-supplier=Future+Electronics, ComponentLink1URL=https://datasheet.octopart.com/AC0201FR-0722RL-Yageo-datasheet-151884373.pdf?src-supplier=Future+Electronics, ComponentLink2Description=https://www.yageo.com/upload/media/product/productsearch/datasheet/rchip/PYu-AC_51_RoHS_L_7.pdf?src-supplier=Digikey, ComponentLink2URL=https://www.yageo.com/upload/media/product/productsearch/datasheet/rchip/PYu-AC_51_RoHS_L_7.pdf?src-supplier=Digikey, ComponentLink3Description=http://www.yageo.com/NewPortal/yageodocoutput?fileName=/pdf/R-Chip/PYu-AC_51_RoHS_L_6.pdf&src-supplier=Digikey, ComponentLink3URL=http://www.yageo.com/NewPortal/yageodocoutput?fileName=/pdf/R-Chip/PYu-AC_51_RoHS_L_6.pdf&src-supplier=Digikey, DesignedBy="Aslı Kurt", Manufacturer Part Number=AC0201FR-0722RL, Pricing 1="10000=0,0022, 40000=0,0022, 200000=0,0021, 400000=0,002, 1250000=0,0019 (USD)", Pricing 2="1=0,012, 25=0,024, 100=0,015, 250=0,014, 1000=0,012 (USD)", Pricing 3="10=0,026, 100=0,016, 500=0,012, 2500=0,009, 5000=0,008, 10000=0,006, 50000=0,0055, 100000=0,005 (EUR)", Pricing 4="500=0,012, 2500=0,009, 5000=0,008, 10000=0,006, 50000=0,0055, 100000=0,005 (EUR)", Pricing 5="1=0,1, 10=0,024, 50=0,024, 100=0,015, 1000=0,012, 10000=0,006 (USD)", Pricing 6="10000=0,009, 20000=0,008 (USD)", Pricing 7="1=0,1, 10=0,024, 50=0,0198, 500=0,0153, 1000=0,01224, 5000=0,0102 (USD)", RoHS=Yes, Stock 1=10000, Stock 2=8618, Stock 3=49610, Stock 4=49610, Stock 5=31530, Stock 6=10000, Stock 7=156463, Supplier 1="Future Electronics", Supplier 2=Avnet, Supplier 3=Farnell, Supplier 4=Farnell, Supplier 5=Mouser, Supplier 6=Newark, Supplier 7=Digikey, Supplier Part Number 2=49AK0137, Supplier Part Number 3=3495168, Supplier Part Number 4=3495168RL, Supplier Part Number 5=603-AC0201FR-0722RL, Supplier Part Number 6=68AK3319, Supplier Part Number 7=YAG3420CT-ND
R3 R8: library part "RES 4K7 OHM 0603", "RES 4K7 %5 OHM 0603 SMD", Case Code (Metric)=1608, Case Code (Imperial)=0603, Manufacturer=Yageo, Max Operating Temperature=155°C, Max Power Dissipation=100mW, Min Operating Temperature=-55°C, Resistance=4.7kR, Resistance Tolerance=5%, Resistor Type="Thick Film", Supplier Part Number 1=311-4.7KGRCT-ND, Temperature Coefficient=100ppm/°C, Voltage Rating=50V, Case/Package=0603, Category="Chip SMD Resistors", ComponentLink1Description=https://datasheet.ciiva.com/46412/443971-46412858.pdf?src-supplier=Element14, ComponentLink1URL=https://datasheet.ciiva.com/46412/443971-46412858.pdf?src-supplier=Element14, Construction=Rectangular, Depth=0.8mm, DesignedBy="Aslı Kurt", Features="Moisture Resistant", Lead Free="Lead Free", Length=1.6mm, Manufacturer Part Number=RC0603JR-074K7L, Military Standard=Not, Number of Pins=2, Number of Terminations=2, Packaging="Tape and Reel", Power Rating=100mW, Pricing 1="1=0,10000, 10=0,01900, 100=0,00770, 1000=0,00344, 2500=0,00298 (USD)", REACH SVHC="No SVHC", RoHS=Yes, RoHS Compliant=Yes, Series=RC, Size Code=0603, Stock 1=3901839, Supplier 1=Digi-Key, Termination=SMD/SMT, Tolerance=5%, Voltage Rating (DC)=50V, Width=0.8mm
R4 R5 R10 R14 R15: library part "RES 10K OHM 0603", "RES 10K %1 OHM 0603 SMD", Case Code (Metric)=1608, Case Code (Imperial)=0603, Manufacturer=Yageo, Max Operating Temperature=155°C, Max Power Dissipation=100mW, Min Operating Temperature=-55°C, Resistance=10kR, Resistance Tolerance=1%, Resistor Type="Thick Film", Supplier Part Number 1=311-10.0KHRCT-ND, Temperature Coefficient=100ppm/°C, Voltage Rating=75V, Voltage Rating (DC)=50V, Case/Package=0603, Category="Chip SMD Resistors", ComponentLink1Description=https://datasheet.ciiva.com/7660/38590-7660789.pdf?src-supplier=Element14, ComponentLink1URL=https://datasheet.ciiva.com/7660/38590-7660789.pdf?src-supplier=Element14, ComponentLink2Description=https://datasheet.ciiva.com/15189/getdatasheetpartid-409289-15189591.pdf?src-supplier=Verical, ComponentLink2URL=https://datasheet.ciiva.com/15189/getdatasheetpartid-409289-15189591.pdf?src-supplier=Verical, ComponentLink3Description=https://datasheet.ciiva.com/46440/1868787-46440891.pdf?src-supplier=Element14, ComponentLink3URL=https://datasheet.ciiva.com/46440/1868787-46440891.pdf?src-supplier=Element14, ComponentLink4Description=https://datasheet.ciiva.com/7983/443971-7983596.pdf?src-supplier=Element14, ComponentLink4URL=https://datasheet.ciiva.com/7983/443971-7983596.pdf?src-supplier=Element14, ComponentLink5Description=https://datasheet.ciiva.com/7746/1738695-7746239.pdf?src-supplier=Element14, ComponentLink5URL=https://datasheet.ciiva.com/7746/1738695-7746239.pdf?src-supplier=Element14, ComponentLink6Description=https://datasheet.ciiva.com/22747/443971-22747519.pdf?src-supplier=Element14, ComponentLink6URL=https://datasheet.ciiva.com/22747/443971-22747519.pdf?src-supplier=Element14, Construction=Rectangular, Depth=0.8mm, DesignedBy="Aslı Kurt", Features="Moisture Resistant", Height=0.45mm, Lead Free="Lead Free", Lead Pitch=0.3mm, Length=1.6mm, Manufacturer Part Number=RC0603FR-0710KL, Military Standard=Not, Number of Pins=2, Number of Terminations=2, Packaging="Tape and Reel", Power Rating=100mW, Pricing 1="1=0,10000, 10=0,02300, 100=0,00930, 1000=0,00417, 2500=0,00362 (USD)", REACH SVHC=Unknown, RoHS=Yes, RoHS Compliant=Yes, Series=RC, Size Code=0603, Stock 1=24140601, Supplier 1=Digi-Key, Termination=SMD/SMT, Tolerance=1%, Weight=7.1E-05oz, Width=0.8mm
R9: library part "RES 680 OHM 1206", "SMD Chip Resistor, 680 Ohm, ï¿½ 1%, 250 mW, 1206 [3216 Metric], Thick Film, General Purpose", Manufacturer=Yageo, Resistance=680R, Supplier Part Number 1=8645095, Voltage Rating (AC)=200V, Category="Chip SMD Resistors", ComponentLink1Description=https://datasheet.ciiva.com/11819/0900766b80c6630a-11819964.pdf?src-supplier=Rs, ComponentLink1URL=https://datasheet.ciiva.com/11819/0900766b80c6630a-11819964.pdf?src-supplier=Rs, ComponentLink2Description=https://datasheet.ciiva.com/7857/444357-7857386.pdf?src-supplier=Element14, ComponentLink2URL=https://datasheet.ciiva.com/7857/444357-7857386.pdf?src-supplier=Element14, ComponentLink3Description=https://datasheet.ciiva.com/7857/1686128-7857387.pdf?src-supplier=Element14, ComponentLink3URL=https://datasheet.ciiva.com/7857/1686128-7857387.pdf?src-supplier=Element14, ComponentLink4Description=https://datasheet.ciiva.com/7857/444357-7857388.pdf?src-supplier=Element14, ComponentLink4URL=https://datasheet.ciiva.com/7857/444357-7857388.pdf?src-supplier=Element14, ComponentLink5Description=https://datasheet.ciiva.com/46445/444357-46445718.pdf?src-supplier=Element14, ComponentLink5URL=https://datasheet.ciiva.com/46445/444357-46445718.pdf?src-supplier=Element14, ComponentLink6Description=https://datasheet.ciiva.com/17422/pyu-rc1206-51-rohs-l-4-17422460.pdf?src-supplier=Future+Electronics, ComponentLink6URL=https://datasheet.ciiva.com/17422/pyu-rc1206-51-rohs-l-4-17422460.pdf?src-supplier=Future+Electronics, DesignedBy="Aslı Kurt", Lead Free=5697LeadFree, Manufacturer Part Number=RC1206FR-07680RL, Pricing 1="5000=0,0057, 20000=0,0055, 75000=0,0052, 200000=0,0051, 500000=0,0049 (USD)", Pricing 2="100=0,012, 1000=0,007, 2500=0,005, 5000=0,005, 10000=0,005 (GBP)", Pricing 3="1=0,104, 25=0,026, 50=0,021, 100=0,016 (USD)", Pricing 4="5000=0,0058, 10000=0,005, 25000=0,005, 50000=0,0037, 125000=0,0036 (USD)", Pricing 5="1=0,1, 10=0,026, 50=0,0204, 100=0,0153, 500=0,01276, 1000=0,0102 (USD)", Pricing 6="1=0,1, 10=0,018, 50=0,018, 100=0,015, 1000=0,009, 10000=0,005 (USD)", RoHS=Yes, Stock 1=315000, Stock 2=2900, Stock 3=8860, Stock 4=830000, Stock 5=2188492, Stock 6=54929, Supplier 1="Future Electronics", Supplier 2=Rs, Supplier 3=Avnet, Supplier 4="Arrow Electronics", Supplier 5=Digikey, Supplier 6=Mouser, Supplier Part Number 2=1988442, Supplier Part Number 3=49AK3834, Supplier Part Number 4=RC1206FR-07680RL, Supplier Part Number 5=311-680FRCT-ND, Supplier Part Number 6=603-RC1206FR-07680RL
R11 R12: library part "RES 330 OHM 0603", "RES, 330R, 1%, 0.125W, 0603;", Manufacturer=Panasonic, Resistance=330R, Supplier Part Number 1=667-ERJ-H3EF3300V, Category="Chip SMD Resistors", ComponentLink1Description=https://datasheet.octopart.com/ERJH3EF3300V-Panasonic-datasheet-165581513.pdf?src-supplier=TME, ComponentLink1URL=https://datasheet.octopart.com/ERJH3EF3300V-Panasonic-datasheet-165581513.pdf?src-supplier=TME, DesignedBy="Aslı Kurt", Manufacturer Part Number=ERJ-H3EF3300V, Pricing 1="1=0,23, 10=0,078, 50=0,078, 100=0,048, 1000=0,039, 10000=0,032 (USD)", Pricing 2="100=0,014, 1000=0,018, 2500=0,017 (GBP)", Pricing 3="10=0,0834, 100=0,0499, 500=0,0409, 1000=0,0318, 2500=0,0276, 5000=0,0234, 25000=0,0215, 50000=0,0196 (EUR)", Pricing 4="500=0,0409, 1000=0,0318, 2500=0,0276, 5000=0,0234, 25000=0,0215, 50000=0,0196 (EUR)", Pricing 5="1=0,21, 10=0,104, 50=0,0698, 100=0,0597, 500=0,04328, 1000=0,03835 (USD)", RoHS=Yes, Stock 1=10551, Stock 2=4600, Stock 3=590, Stock 4=590, Stock 5=8987, Supplier 1=Mouser, Supplier 2=Rs, Supplier 3=Farnell, Supplier 4=Farnell, Supplier 5=Digikey, Supplier Part Number 2=2276644, Supplier Part Number 3=3645156, Supplier Part Number 4=3645156RL, Supplier Part Number 5=10-ERJ-H3EF3300VCT-ND
R13 R16: library part "RES 15 OHM 0603", "RES 15 %5 OHM 0603 SMD", Case Code (Metric)=1608, Case Code (Imperial)=0603, Manufacturer=Yageo, Max Operating Temperature=155°C, Max Power Dissipation=100mW, Min Operating Temperature=-55°C, Package Quantity=1, Resistance=15R, Resistance Tolerance=5%, Resistor Type="Thick Film", Supplier Part Number 1=311-15GRCT-ND, Temperature Coefficient=100ppm/°C, Voltage Rating=75V, Voltage Rating (DC)=50V, Case/Package=0603, Category="Chip SMD Resistors", ComponentLink1Description=https://datasheet.ciiva.com/2453/pyu-r-int-thick-7-2453085.pdf?src-supplier=Digi-Key, ComponentLink1URL=https://datasheet.ciiva.com/2453/pyu-r-int-thick-7-2453085.pdf?src-supplier=Digi-Key, ComponentLink2Description=https://datasheet.ciiva.com/7746/443971-7746445.pdf?src-supplier=Element14, ComponentLink2URL=https://datasheet.ciiva.com/7746/443971-7746445.pdf?src-supplier=Element14, ComponentLink3Description=https://datasheet.ciiva.com/2453/pyu-r-int-thick-7-2453086.pdf?src-supplier=Digi-Key, ComponentLink3URL=https://datasheet.ciiva.com/2453/pyu-r-int-thick-7-2453086.pdf?src-supplier=Digi-Key, ComponentLink4Description=https://datasheet.ciiva.com/7746/443971-7746446.pdf?src-supplier=Element14, ComponentLink4URL=https://datasheet.ciiva.com/7746/443971-7746446.pdf?src-supplier=Element14, ComponentLink5Description=https://datasheet.ciiva.com/2453/pyu-r-int-thick-7-2453087.pdf?src-supplier=Digi-Key, ComponentLink5URL=https://datasheet.ciiva.com/2453/pyu-r-int-thick-7-2453087.pdf?src-supplier=Digi-Key, Construction=Rectangular, Depth=0.8mm, DesignedBy="Aslı Kurt", Features="Moisture Resistant", Height=0.022inch, Lead Free="Lead Free", Length=1.6mm, Manufacturer Part Number=RC0603JR-0715RL, Military Standard=Not, Number of Pins=2, Number of Terminations=2, Packaging="Tape and Reel", Power Rating=100mW, Pricing 1="1=0,10000, 10=0,01900, 100=0,00770, 1000=0,00344, 2500=0,00298 (USD)", REACH SVHC="No SVHC", RoHS=Yes, RoHS Compliant=Yes, Series=RC, Stock 1=1720, Supplier 1=Digi-Key, Termination=SMD/SMT, Tolerance=5%, Weight=7.1E-05oz, Width=0.8mm, Working Voltage=75V
R17: library part "RES 100 OHM 0603", "RES 100 %5 OHM 0603 SMD", Case Code (Metric)=1608, Case Code (Imperial)=0603, Manufacturer=Yageo, Max Operating Temperature=155°C, Max Power Dissipation=100mW, Min Operating Temperature=-55°C, Resistance=100R, Resistance Tolerance=5%, Resistor Type="Thick Film", Supplier Part Number 1=311-100GRCT-ND, Temperature Coefficient=100ppm/°C, Voltage Rating=50V, Case/Package=0603, Category="Chip SMD Resistors", ComponentLink1Description=https://datasheet.ciiva.com/15189/getdatasheetpartid-325207-15189846.pdf?src-supplier=Verical, ComponentLink1URL=https://datasheet.ciiva.com/15189/getdatasheetpartid-325207-15189846.pdf?src-supplier=Verical, ComponentLink2Description=https://datasheet.ciiva.com/8883/pyu-rc0603-51-rohs-l-4-8883047.pdf?src-supplier=Avnet, ComponentLink2URL=https://datasheet.ciiva.com/8883/pyu-rc0603-51-rohs-l-4-8883047.pdf?src-supplier=Avnet, ComponentLink3Description=https://datasheet.ciiva.com/7746/443971-7746425.pdf?src-supplier=Element14, ComponentLink3URL=https://datasheet.ciiva.com/7746/443971-7746425.pdf?src-supplier=Element14, ComponentLink4Description=https://datasheet.ciiva.com/7746/443971-7746426.pdf?src-supplier=Element14, ComponentLink4URL=https://datasheet.ciiva.com/7746/443971-7746426.pdf?src-supplier=Element14, Construction=Rectangular, Contact Plating=Tin,Matte, Depth=0.8mm, DesignedBy="Aslı Kurt", Features="Moisture Resistant", Lead Free="Lead Free", Length=1.6mm, Manufacturer Part Number=RC0603JR-07100RL, Military Standard=Not, Number of Pins=2, Number of Terminations=2, Packaging="Tape and Reel", Power Rating=100mW, Pricing 1="1=0,10000, 10=0,01900, 100=0,00770, 1000=0,00344, 2500=0,00298 (USD)", Radiation Hardening=No, REACH SVHC=Unknown, RoHS=Yes, RoHS Compliant=Yes, Series=RC, Size Code=0603, Stock 1=4334796, Supplier 1=Digi-Key, Termination=SMD/SMT, Tolerance=5%, Voltage Rating (DC)=50V, Width=0.8mm
R18: library part "RES 1K5 OHM 0805", "SMD Chip Resistor, 1.5 kOhm, ï¿½ 1%, 125 mW, 0805 [2012 Metric], Thick Film, General Purpose", Case Code (Metric)=2012, Case Code (Imperial)=0805, Manufacturer=Yageo, Max Operating Temperature=155°C, Max Power Dissipation=125mW, Min Operating Temperature=-55°C, Package Quantity=5000, Resistance=1.5kR, Resistance Tolerance=1%, Resistor Type="Thick Film", Supplier Part Number 1=4797627, Temperature Coefficient=100ppm/°C, Voltage Rating=150V, Case/Package=0805, Category="Chip SMD Resistors", ComponentLink1Description=https://datasheet.ciiva.com/17423/rc0805-17423247.pdf?src-supplier=Future+Electronics, ComponentLink1URL=https://datasheet.ciiva.com/17423/rc0805-17423247.pdf?src-supplier=Future+Electronics, DesignedBy="Aslı Kurt", Features="Moisture Resistant", Height=0.5mm, Lead Free="Lead Free", Length=2mm, Manufacturer Part Number=RC0805FR-071K5L, Number of Terminations=2, Packaging="Tape and Reel", Power Rating=125mW, Pricing 1="5000=0,0041, 25000=0,0039, 100000=0,0038, 250000=0,0037, 625000=0,0035 (USD)", Pricing 2="5000=0,00207 (USD)", Pricing 3="500=0,0091, 1000=0,0072, 2500=0,0071 (EUR)", Pricing 4="100=0,008, 1000=0,004, 2500=0,004, 5000=0,003, 10000=0,003 (GBP)", Pricing 5="1=0,1, 10=0,016, 50=0,016, 100=0,01, 1000=0,007, 10000=0,004 (USD)", Pricing 6="1=0,1, 10=0,016, 50=0,0132, 500=0,0102, 1000=0,00714 (USD)", Reach SVHC Compliant=Unknown, RoHS=Yes, RoHS Compliant=Yes, Series=RC, Size Code=0805, Stock 1=1590000, Stock 2=10000, Stock 3=120909, Stock 4=13600, Stock 5=365697, Stock 6=528695, Supplier 1="Future Electronics", Supplier 2=Avnet, Supplier 3=Farnell, Supplier 4=Rs, Supplier 5=Mouser, Supplier 6=Digikey, Supplier Part Number 2=RC0805FR-071K5L, Supplier Part Number 3=9237518RL, Supplier Part Number 4=1995669, Supplier Part Number 5=603-RC0805FR-071K5L, Supplier Part Number 6=311-1.50KCRDKR-ND, Termination=SMD/SMT, Tolerance=1%, Voltage Rating (AC)=150V, Width=1.25mm